# Altium PCB PCBV2.PcbDoc
Units mil, origin at the board's own origin, x right, y up, seen from the top; angles counter-clockwise.
Board outline 5453 x 2843 mil, 2 copper layers (Top Layer, Bottom Layer); 65 components, 76 nets, 228 pads, 96 vias.
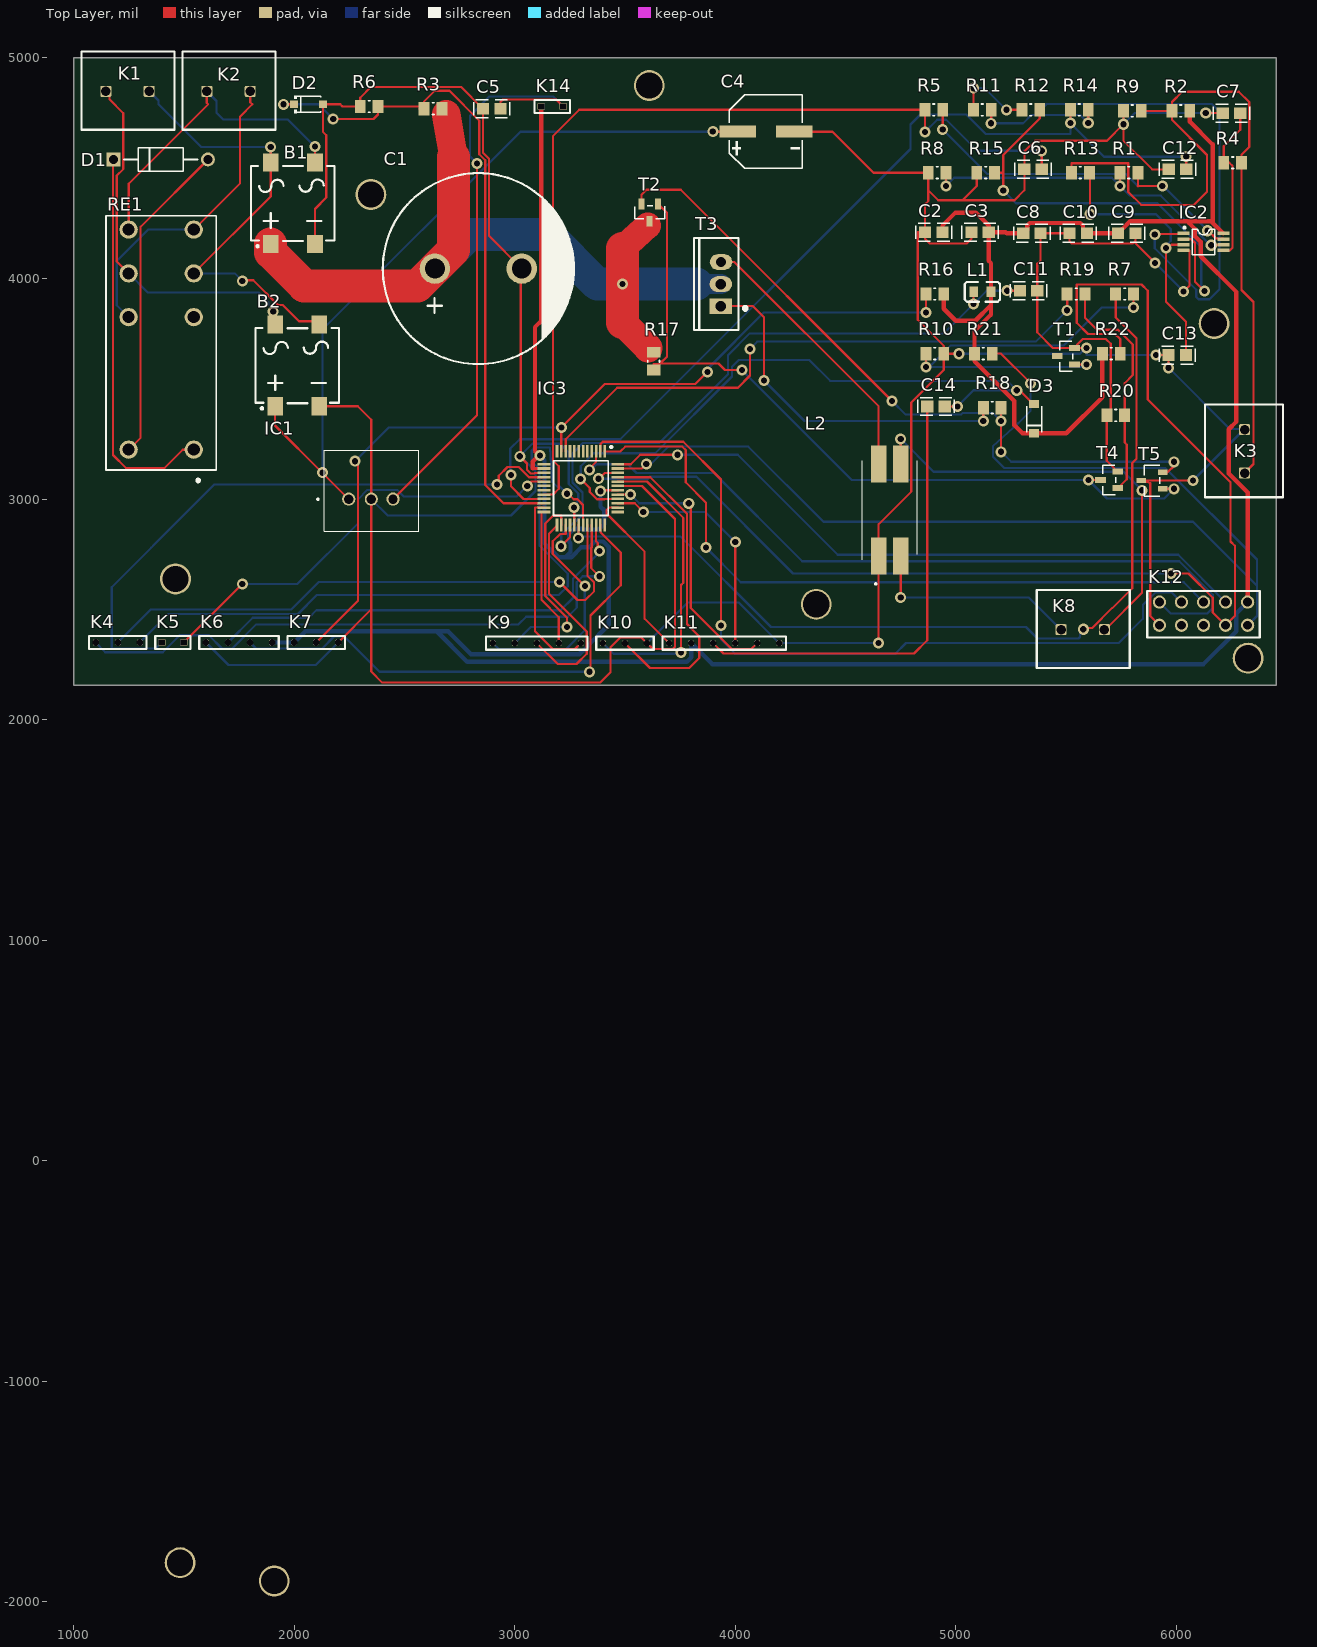
[diagram p0: Top Layer view]
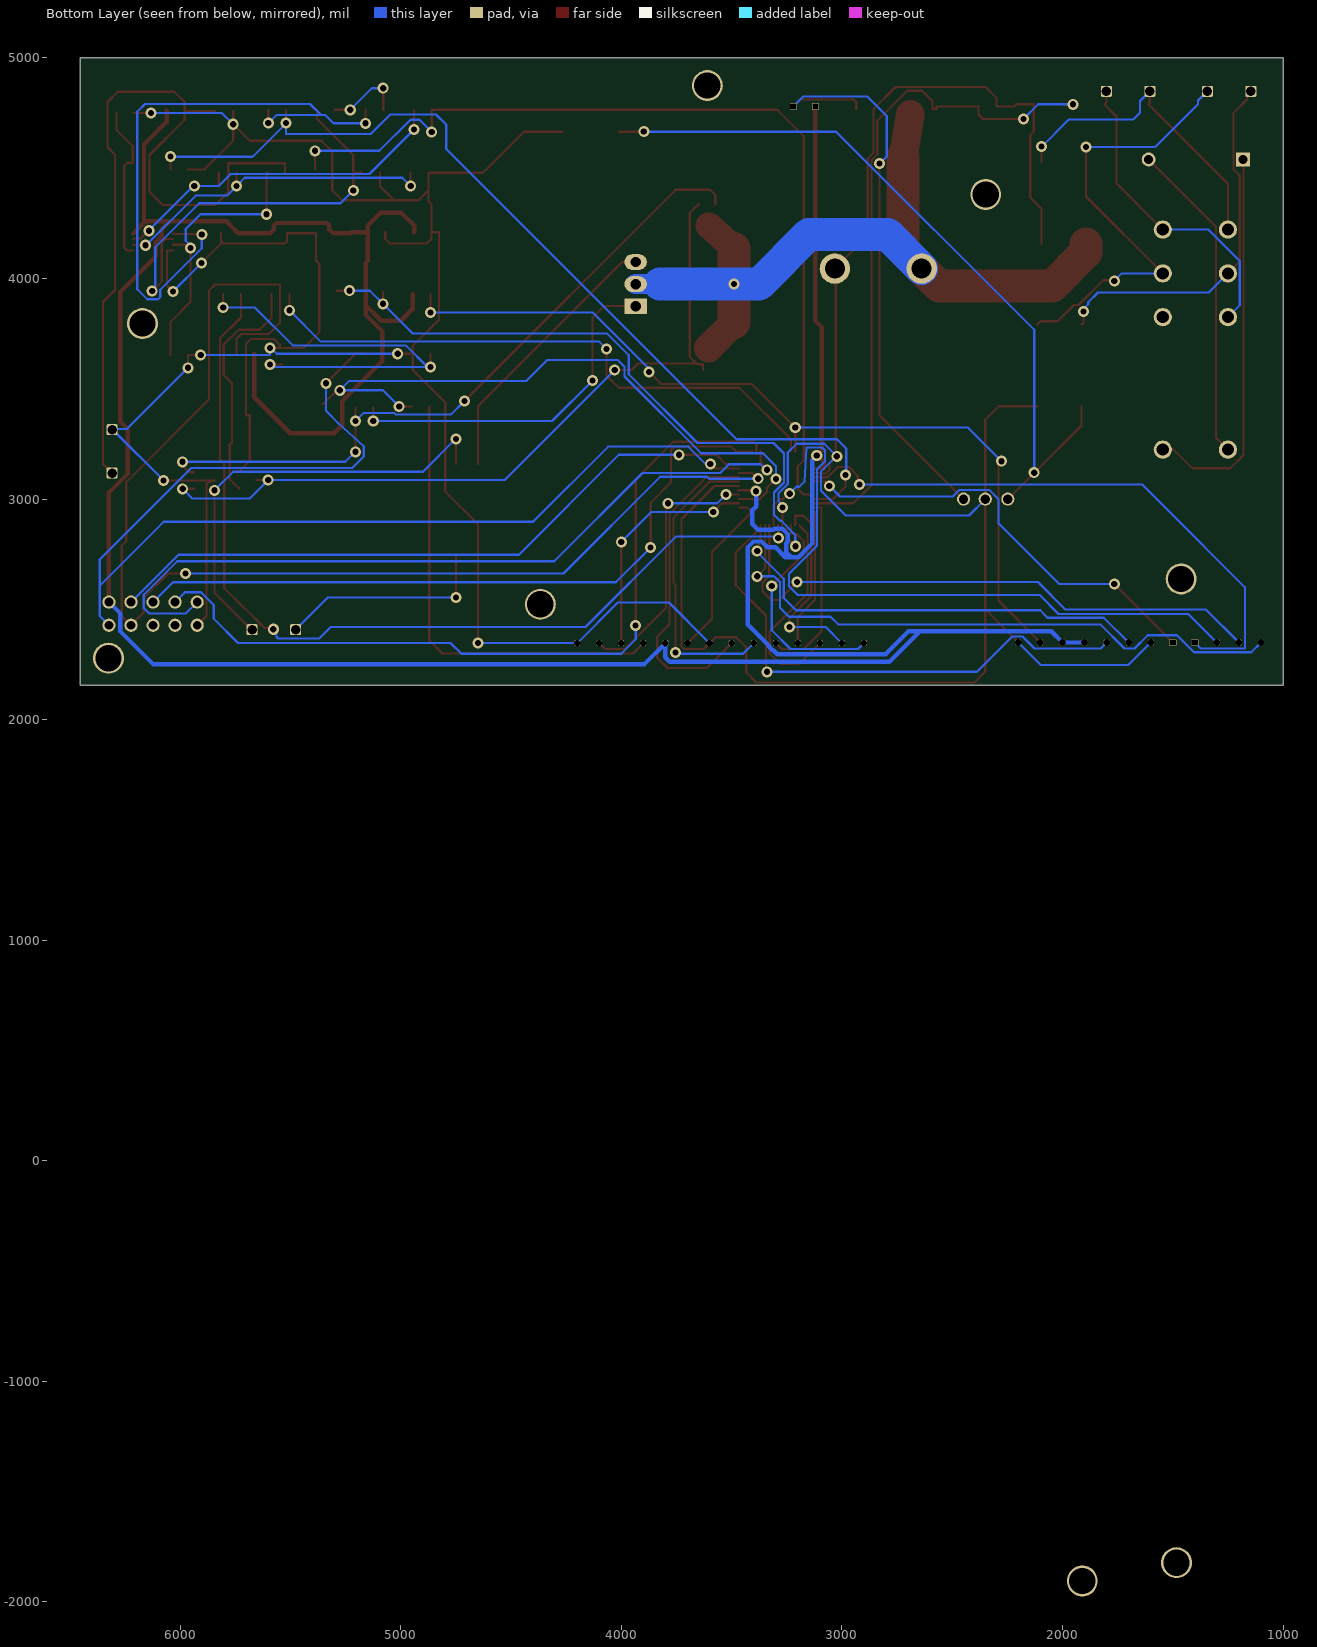
[diagram p1: Bottom Layer view, seen from below]

## Layer stack, top to bottom
Top Solder: solder mask 0.4, Solder Resist, Dk 3.5
Top Layer: signal copper 1.4
Dielectric 1: dielectric 12.6, FR-4, Dk 4.8
Bottom Layer: signal copper 1.4
Bottom Solder: solder mask 0.4, Solder Resist, Dk 3.5

## Board outline
1000,2157 6453,2157 6453,5000 1000,5000

## Design rules (kind name [scope] priority, off if disabled: settings)
Clearance [All] p1: gap=7 ignorepadtopadclearanceinfootprint=FALSE
HoleSize [All] p1: absolutevalues=TRUE maxlimit=150 minlimit=1 maxpercent=80.000 minpercent=20.000
MinimumSolderMaskSliver [All] p1: minsoldermaskwidth=6.8
PolygonConnect [All] p1: connectstyle=Relief reliefconductorwidth=10 reliefentries=4 polygonreliefangle="90 Angle" airgapwidth=10
RoutingVias [All] p1: holewidth=28 width=50 viastyle="Through Hole" minholewidth=28 minwidth=50 maxholewidth=28 maxwidth=50
SilkToSolderMaskClearance [IsPad] p1: minsilkscreentomaskgap=6.8 clearancetoexposedcopper=TRUE
SolderMaskExpansion [All] p1: expansion=4 istentingtop=FALSE
Width [All] p1: maxlimit=150 minlimit=10 preferedwidth=10
27 further rules are at their usual default settings.

## Classes and differential pairs
component class Voeding: B1 B2 C1 C4 C5 D1 D2 IC1 K1 K2 K14 R3 R6 RE1
component class Thermokoppel: C6 C7 C12 C13 IC2 K3 R1 R2 R4 R5 R8 R9 R11 R12 R13 R14 R15
component class PWMSoldeerbout: K8 L2 R17 R18 R20 T2 T3 T4 T5
component class Microcontroller: C2 C3 C8 C9 C10 C11 C14 D3 IC3 K4 K5 K7 K9 K10 K11 K12 L1 R7 R10 R16 R19 R21 R22 T1

## Components (designator, comment, footprint, x,y, rotation, side; value= is the part's Value field where it differs from the comment)
B1 "TTR8MF" "B1,2 Brug gelijkrichter" 1990,4330 r0 top
B2 "TTR8MF" "B1,2 Brug gelijkrichter" 2010,3595 r0 top
C1 "4700uF" "C1 4700uF" 2835,4045 r0 top
C2 "10uF" "C2,5,10 10uF" 4900,4210 r0 top
C3 "100nF" "C6,7,12,13 10nF" 5110,4210 r0 top
C4 "100uF" "C4 100uF" 4139,4666 r0 top
C5 "10uF" "C2,5,10 10uF" 2895.63,4770 r0 top
C6 "10nF" "C6,7,12,13 10nF" 5350,4495 r0 top
C7 "10nF" "C6,7,12,13 10nF" 6250,4750 r0 top
C8 "100nF" "C6,7,12,13 10nF" 5345,4205 r0 top
C9 "100nF" "C6,7,12,13 10nF" 5775,4205 r0 top
C10 "10uF" "C2,5,10 10uF" 5555,4205 r0 top
C11 "100nF" "C6,7,12,13 10nF" 5330,3945 r0 top
C12 "10nF" "C6,7,12,13 10nF" 6005,4495 r0 top
C13 "10nF" "C6,7,12,13 10nF" 6004,3653 r0 top
C14 "100nF" "C6,7,12,13 10nF" 4910,3420 r0 top
D1 "1N4007" FP-1N4007-MFG 1395,4540 r0 top value=15pF
D2 "" "D2 zener diode" 2065,4790 r0 top
D3 "1N4148" "D3 1N14148" 5355,3365 r90 top
IC1 "" "IC1 DC-DC converter" 2247.64,3000 r0 top
IC2 "" "IC2 opamps" 6123,4166 r270 top
IC3 "ATMEGA4809-AU" "IC3 ATMEGA4809-AU" 3300,3050 r270 top
K1 "" Terminal_2 1156,4784 r0 top
K2 "" Terminal_2 1614,4784 r0 top
K3 "" Terminal_2 6374,3128 r90 top
K4 "" PInHeader_3 1110,2285 r0 top
K5 "" PInHeader_2 1410,2285 r0 top
K6 "" PInHeader_4 1610,2285 r0 top
K7 "" PInHeader_3 2010,2285 r0 top
K8 "" Terminal_2 5487,2343 r0 top
K9 "" PInHeader_5 2910,2282 r0 top
K10 "" PInHeader_3 3410,2282 r0 top
K11 "" PInHeader_6 3710,2282 r0 top
K12 "" BOxHeader_10 5968,2518 r0 top
K14 "" PInHeader_2 3130,4715 r0 top
L1 "10uH" "L2 SmoorSpoel" 5120,3940 r0 top
L2 "" "L1 Smoorspoel" 4700,2950 r0 top
R1 "18K" RESC2013X50X30ML20T20 5785,4480 r0 top
R2 "1M" RESC2013X50X30ML20T20 6020,4760 r0 top
R3 "68K" RESC2013X50X30ML20T20 2629.65,4770 r0 top
R4 "5K6" RESC2013X50X30ML20T20 6255,4525 r0 top
R5 "5K6" RESC2013X50X30ML20T20 4900,4765 r0 top
R6 "10K" RESC2013X50X30ML20T20 2340,4780 r0 top
R7 "10K" RESC2013X50X30ML20T20 5765,3930 r0 top
R8 "100" RESC2013X50X30ML20T20 4915,4480 r0 top
R9 "10M" RESC2013X50X30ML20T20 5800,4760 r0 top
R10 "4K7" RESC2013X50X30ML20T20 4905,3660 r0 top
R11 "18K" RESC2013X50X30ML20T20 5120,4765 r0 top
R12 "18K" RESC2013X50X30ML20T20 5340,4765 r0 top
R13 "5K6" RESC2013X50X30ML20T20 5565,4480 r0 top
R14 "5K6" RESC2013X50X30ML20T20 5560,4765 r0 top
R15 "100" RESC2013X50X30ML20T20 5135,4480 r0 top
R16 "4K7" RESC2013X50X30ML20T20 4905,3930 r0 top
R17 "4K7" RESC2013X50X30ML20T20 3630,3625.35 r90 top
R18 "100" RESC2013X50X30ML20T20 5165,3415 r0 top
R19 "10K" RESC2013X50X30ML20T20 5545,3930 r0 top
R20 "4K7" RESC2013X50X30ML20T20 5725,3380 r0 top
R21 "4K7" RESC2013X50X30ML20T20 5125,3660 r0 top
R22 "4K7" RESC2013X50X30ML20T20 5705,3660 r0 top
RE1 "" "RE1 Vermogen relais" 1397.36,3224.21 r90 top
T1 "BC847C" "T1,2,4 Bipolar Transistors" 5505,3645 r0 top
T2 "BC847" "T1,2,4 Bipolar Transistors" 3615,4305 r90 top
T3 "IRF9Z34NPBF" "T3 MOSFET-P" 3935.19,3975 r90 top
T4 "BC847" "T1,2,4 Bipolar Transistors" 5701,3084 r0 top
T5 "BC857" "T5 Bipolar Transistors" 5889.63,3084 r0 top

## Footprints (in the part's own frame and the unit in brackets; to place one, negate y for a bottom-side part, rotate by r counter-clockwise, add the part's x,y. Pads: shape width x height; smd on the part's side, far side on the other; paste and mask are expansions set on the pad)
"B1,2 Brug gelijkrichter" [mm]
  rect 1.8x2.1 smd: 1(-2.449,-4.411) 2(2.651,-4.411) 3(2.651,4.989) 4(-2.449,4.989)
  silkscreen extent -4.7,-4.79 4.9,4.59
BOxHeader_10 [mil]
  round 60 hole 40: 1(-45,-90) 2(-45,15) 3(55,-90) 4(55,15) 5(155,-90) 6(155,15) 7(255,-90) 8(255,15) 9(355,-90) 10(355,15)
  silkscreen extent -100,-145 410,65
"C1 4700uF" [mm] "CAP-TH_BD22.0-P10.00-D2.3-FD"
  round 3.5 hole 2.3: 1(-5,0) 2(5,0)
  silkscreen extent -11,-11 11,11
"C2,5,10 10uF" [mm] "C0805"
  rect 1.41x1.35 smd: 1(-1,0) 2(1,0)
  silkscreen extent -2.09,-1.03 2.09,1.03
"C4 100uF" [mm]
  rect 4.2x1.4 smd: 1(-3.267,0) 2(3.267,0)
  silkscreen extent -4.2,-4.23 4.2,4.23
"C6,7,12,13 10nF" [mm] "C0805"
  rect 1.41x1.35 smd: 1(-1,0) 2(1,0)
  silkscreen extent -2.09,-1.03 2.09,1.03
"D2 zener diode" [mm] "SOD-123_L2.7-W1.7-LS3.8-RD"
  rect 0.91x0.84 smd: 1(-1.655,0) 2(1.655,0)
  silkscreen extent -1.65,-1 1.43,1
"D3 1N14148" [mm] "SOD-123_L2.8-W1.8-LS3.7-RD"
  rect 0.95x1.15 smd: 1(-1.693,0) 2(1.693,0)
  silkscreen extent -1.58,-0.87 1.41,0.87
FP-1N4007-MFG [mm]
  rect 1.6x1.6 hole 1.05 paste-1000 mask+0: 1(-5.438,0)
  round 1.6 hole 1.05 paste-1000 mask+0: 2(5.438,0)
  silkscreen extent -4.24,-1.35 4.24,1.35, body extent -6.34,-1.45 6.34,1.45, height 0.25
"IC1 DC-DC converter" [mm] "OKI78SR515W36C"
  round 1.519 hole 1.08: 1(0,0) 2(2.6,0) 3(5.1,0)
  silkscreen extent -3.6,-3.7 8.05,5.6, body extent -10,-3.38 10,3.38, height 5.8
"IC2 opamps" [mil] "MSOP-8_L3.0-W3.0-P0.65-LS4.9-BL MCP6002-E/MS"
  rect 15.98x55 smd: 1(-38.39,-90.56) 2(-12.8,-90.56) 3(12.8,-90.55) 4(38.39,-90.55) 5(38.39,90.56) 6(12.8,90.56) 7(-12.8,90.55) 8(-38.39,90.55)
  silkscreen extent -70,-91 59,51
"IC3 ATMEGA4809-AU" [mm] "QFP50P900X900X120-48N"
  rect 1.475x0.3 smd: 1(-4.238,2.75) 2(-4.238,2.25) 3(-4.238,1.75) 4(-4.238,1.25) 5(-4.238,0.75) 6(-4.238,0.25) 7(-4.238,-0.25) 8(-4.238,-0.75) 9(-4.238,-1.25) 10(-4.238,-1.75) 11(-4.238,-2.25) 12(-4.238,-2.75) 25(4.238,-2.75) 26(4.238,-2.25) 27(4.238,-1.75) 28(4.238,-1.25) 29(4.238,-0.75) 30(4.238,-0.25) 31(4.238,0.25) 32(4.238,0.75) 33(4.238,1.25) 34(4.238,1.75) 35(4.238,2.25) 36(4.238,2.75)
  rect 0.3x1.475 smd: 13(-2.75,-4.238) 14(-2.25,-4.238) 15(-1.75,-4.238) 16(-1.25,-4.238) 17(-0.75,-4.238) 18(-0.25,-4.238) 19(0.25,-4.238) 20(0.75,-4.238) 21(1.25,-4.238) 22(1.75,-4.238) 23(2.25,-4.238) 24(2.75,-4.238) 37(2.75,4.238) 38(2.25,4.238) 39(1.75,4.238) 40(1.25,4.238) 41(0.75,4.238) 42(0.25,4.238) 43(-0.25,4.238) 44(-0.75,4.238) 45(-1.25,4.238) 46(-1.75,4.238) 47(-2.25,4.238) 48(-2.75,4.238)
  silkscreen extent -4.85,-3.15 3.15,3.63, body extent -10,-3.38 10,3.38, height 5.8
"L1 Smoorspoel" [mm]
  rect 1.78x4.27 smd: 1(-1.27,-5.305) 2(1.27,-5.305) 3(1.27,5.305) 4(-1.27,5.305)
  silkscreen extent -3.15,-8.6 3.15,5.69, body extent -10,-3.38 10,3.38, height 5.8
"L2 SmoorSpoel" [mm]
  rect 1x1.25 smd: 1(-1,0) 2(1,0)
  silkscreen extent -2.03,-1.14 2.03,1.14
PInHeader_2 [mil]
  rrect25% 32x32 hole 26 square: 1(-10,65) 2(90,65)
  silkscreen extent -40,35 120,95
PInHeader_3 [mil]
  rrect50% 26x26 hole 30: 1(-10,65) 2(90,65) 3(190,65)
  silkscreen extent -40,35 220,95
PInHeader_4 [mil]
  rrect50% 26x26 hole 30: 1(-10,65) 2(90,65) 3(190,65) 4(290,65)
  silkscreen extent -40,35 320,95
PInHeader_5 [mil]
  rrect50% 26x26 hole 30: 1(-10,65) 2(90,65) 3(190,65) 4(290,65) 5(390,65)
  silkscreen extent -40,35 420,95
PInHeader_6 [mil]
  rrect50% 26x26 hole 30: 1(-10,65) 2(90,65) 3(190,65) 4(290,65) 5(390,65) 6(490,65)
  silkscreen extent -40,35 520,95
"RE1 Vermogen relais" [mm] "RT42"
  round 2.1 hole 1.4: 1(0,-3.75) 2(15.26,-3.75) 3(20.3,-3.75) 4(25.34,-3.75) 5(25.34,3.75) 6(20.3,3.75) 7(15.26,3.75) 8(0,3.75)
  silkscreen extent -3.67,-6.35 26.92,6.35, body extent -10,-3.38 10,3.38, height 5.8
RESC2013X50X30ML20T20 [mm] "Chip Resistor, 2-Leads, Body 2.00x1.25mm, IPC Low Density"
  rect 1.25x1.55 smd: 1(-1.025,0) 2(1.025,0)
  silkscreen extent -0.1,-0.67 0.1,0.67, body extent -1.1,-0.72 1.1,0.72, height 0.5
"T1,2,4 Bipolar Transistors" [mm] "BC847C"
  rect 1.25x0.7 smd: 1(0.847,-0.872) 2(0.847,1.028) 3(-1.153,0.078)
  silkscreen extent -0.89,-1.65 0.64,1.78
"T3 MOSFET-P" [mm] "TO-220-3_L10.0-W4.5-P2.54-L"
  rect 1.8x2.6 hole 1.2: 1(-2.54,0.005)
  oval 1.8x2.6 hole 1.2: 2(0,0.005) 3(2.54,-0.005)
  silkscreen extent -5.3,-2.99 5.3,3.09
"T5 Bipolar Transistors" [mm] "SOT-23-3_L2.9-W1.6-P1.90-LS2.8-BR"
  rect 1.07x0.6 smd: 1(1.235,-0.95) 2(1.235,0.95) 3(-1.235,0)
  silkscreen extent -0.88,-1.78 0.89,1.78
Terminal_2 [mil]
  rrect25% 50x50 hole 43.31: 1(-10,65) 2(186.85,65)
  silkscreen extent -120,-109 301,245

## Part data
B1 B2: library part "B1,2 Brug Gelijkrichter", BOM_JLCPCB Part Class="Extended Part", BOM_Manufacturer=MDD, BOM_Manufacturer Part=TTR8MF, BOM_Supplier=LCSC, BOM_Supplier Part=C712546, Contributor=LCSC, spicePre=D, spiceSymbolName=TTR8MF
C1: library part "C1 4700uF", BOM_JLCPCB Part Class="Extended Part", BOM_Manufacturer=CX(承兴), BOM_Manufacturer Part=KM478M050N35RR0VH2FP0, BOM_Supplier=LCSC, BOM_Supplier Part=C45662, nameAlias=Capacitance, spicePre=C, spiceSymbolName="4700uF 50V 22*35"
C2 C5 C10: library part "C2,5,10 10uF", BOM_JLCPCB Part Class="Basic Part", BOM_Manufacturer=muRata(村田), BOM_Manufacturer Part=GRM21BR61H106KE43L, BOM_Supplier=LCSC, BOM_Supplier Part=C440198, Contributor=LCSC, nameAlias=Capacitance, spicePre=C, spiceSymbolName=GRM21BR61H106KE43L
C3 C14: library part "C 100nF"
C4: library part "C4 100uF", BOM_JLCPCB Part Class="Extended Part", BOM_Manufacturer=Nichicon(尼吉康), BOM_Manufacturer Part=UWT1H101MNL1GS, BOM_Supplier=LCSC, BOM_Supplier Part=C445063, Contributor=LCSC, nameAlias=Capacitance, spicePre=C, spiceSymbolName=UWT1H101MNL1GS
C6 C7 C8 C9 C11 C12 C13: library part "C6,7,12,13 10nF", BOM_JLCPCB Part Class="Extended Part", BOM_Manufacturer=CCTC(三环), BOM_Manufacturer Part=TCC0805X7R103M500DT, BOM_Supplier=LCSC, BOM_Supplier Part=C376921, Contributor=LCSC, nameAlias=Capacitance, spicePre=C, spiceSymbolName=TCC0805X7R103M500DT
D1: library part zo_1N4007, "DIODE GEN PURP 1KV 1A DO204AL", Capacitance=15pF, Forward Current=1A, Manufacturer=Vishay, Manufacturer Part Number=1N4007-E3/54, Max Junction Temp=+150°C, Max Repetitive Reverse Voltage=1000V, Max Surge Forward Current=30A, Peak Reverse Current=30uA, Temperature="-50°C to +150°C", Temperature Range Low=-50°C, Automotive=No, Category=Diode, ComponentLink2Description=Datasheet, ComponentLink2URL=http://www.vishay.com/docs/88503/1n4001.pdf, Device Class L1="Discrete Semiconductors", Device Class L2=Diodes, Device Class L3="Rectifier Diodes", Digikey Description="DIODE GEN PURP 1KV 1A DO204AL", Height=2.7mm, Ipc Land Pattern Name=DIOPA1088W105L520D270, Lead Free=Yes, Mouser Description="Rectifiers Vr/1000V Io/1A", Octopart=https://octopart.com/1n4007-e3%2F54-vishay-39548207, Package=1N4007, RoHS=TRUE, Temperature Range High=+150°C
D2: library part "D2 zener diode", "BZT52C5V1_C1884555", BOM_JLCPCB Part Class="Extended Part", BOM_Manufacturer=YFW(佑风微), BOM_Manufacturer Part=BZT52C5V1, BOM_Supplier=LCSC, BOM_Supplier Part=C1884555, Contributor=LCSC, spicePre=D, spiceSymbolName=BZT52C5V1_C1884555
D3: library part "D3 1N14148", "1N4148W-C84367", BOM_JLCPCB Part Class="Extended Part", BOM_Manufacturer=MDD, BOM_Manufacturer Part=1N4148W, BOM_Supplier=LCSC, BOM_Supplier Part=C84367, spicePre=D, spiceSymbolName=1N4148W-C84367
IC1: library part "IC1 OKI-78SR-5_1.5-W36-C", "Non-Isolated DC/DC Converters 7.5W 24Vin 5Vout1 1.5A SIP Non-Iso", Manufacturer_Name="Murata Electronics", Manufacturer_Part_Number=OKI-78SR-5/1.5-W36-C, Mouser Part Number=580-OKI78SR5/1.5W36C, Datasheet Link=https://www.murata.com/products/productdata/8807037992990/oki-78sr.pdf?1583754815000, Geometry.Height=16.5mm, Mouser Price/Stock=https://www.mouser.co.uk/ProductDetail/Murata-Power-Solutions/OKI-78SR-5-1.5-W36-C?qs=uJpRT2lXVNXJP%252Bo08dQqJQ%3D%3D
IC2: library part "IC2 dual opamps", "IC2 dual opamps"
IC3: library part "IC3 ATMEGA4809-AU", "8-bit Microcontrollers - MCU 20MHz, 48KB, TQFP", Manufacturer_Name=Microchip, Mouser Part Number=556-ATMEGA4809-AU, Geometry.Height=1.2mm, Manufacturer_Part_Number=ATMEGA4809-AU, Mouser Price/Stock=https://www.mouser.co.uk/ProductDetail/Microchip-Technology-Atmel/ATMEGA4809-AU?qs=P1JMDcb91o4zLIorxO9tIg%3D%3D
K1 K2 K3 K8: library part "K Terminal_2"
K4 K7 K10: library part "K PinHeader_3"
K5 K14: library part "K PinHeader_2"
K6: library part "K PinHeader_4"
K9: library part "K PinHeader_5"
K11: library part "K PinHeader_6"
K12: library part "K Boxheader_10"
L1: library part "L2 smoorspoel", BOM_JLCPCB Part Class="Extended Part", BOM_Manufacturer=KOHERelec(科或), BOM_Manufacturer Part=PMI201214S-100M, BOM_Supplier=LCSC, BOM_Supplier Part=C2922559, Contributor=LCSC, nameAlias=Inductance, spicePre=L, spiceSymbolName=PMI201214S-100M
L2: library part "L2 Common Mode Choke", "Common Mode Chokes / Filters 170ohms 100MHz 10A 1 Choke SMD", Manufacturer_Name="Laird Performance Materials", Manufacturer_Part_Number=CM2545X171R-10, Mouser Part Number=875-CM2545X171R-10, Datasheet Link=https://componentsearchengine.com/Datasheets/1/CM2545X171R-10.pdf, Geometry.Height=9.5mm, Mouser Price/Stock=https://www.mouser.co.uk/ProductDetail/Laird-Performance-Materials/CM2545X171R-10?qs=gHrF1kHvtHWa9UjYzLX7bQ%3D%3D
R1 R2 R3 R4 R5 R6 R7 R8 R9 R10 R11 R12 R13 R14 R15 R16 R17 R18 R19 R20 R21 R22: library part "R Resistor", Manufacturer="Vishay Dale", Part Number=CRCW08050000Z0EA
RE1: library part "RE1 Vermogen relais", "RT424005F  General Purpose Relays DPDT 8A 5VDC GEN PURPOSE RELAY", Manufacturer_Name="TE Connectivity", Manufacturer_Part_Number=RT424005F, Mouser Part Number=655-RT424005F, Datasheet Link=https://datasheet.datasheetarchive.com/originals/distributors/Datasheets_SAMA/2ef22a7a34dcc6453ddb52063c55ccaa.pdf, Mouser Price/Stock=https://www.mouser.co.uk/ProductDetail/TE-Connectivity-PB/RT424005F?qs=8wHch9UpSvaH%252B%252BmsSCbj0Q%3D%3D
T1: library part "T1,2,4 transisitors", "BC847C_C3027113", BOM_JLCPCB Part Class="Extended Part", BOM_Manufacturer=SALLTECH(萨瑞), BOM_Manufacturer Part=BC847C, BOM_Supplier=LCSC, BOM_Supplier Part=C3027113, Contributor=lcsc, link=https://atta.szlcsc.com/upload/public/pdf/source/20220824/287706FC7904CA05889B348536529CCD.pdf, spicePre=Q, spiceSymbolName=BC847C_C3027113
T2 T4: library part "T1,2,4 transisitors", "BC847C_C3027113", BOM_JLCPCB Part Class="Extended Part", BOM_Manufacturer=SALLTECH(萨瑞), BOM_Manufacturer Part=BC847C, BOM_Supplier=LCSC, BOM_Supplier Part=C3027113, Contributor=lcsc, link=https://atta.szlcsc.com/upload/public/pdf/source/20220824/287706FC7904CA05889B348536529CCD.pdf, spicePre=Q, spiceSymbolName=BC847C_C3027113
T3: library part "T3 MOSFET-P", BOM_JLCPCB Part Class="Extended Part", BOM_Manufacturer=Infineon(英飞凌), BOM_Manufacturer Part=IRF9Z34NPBF, BOM_Supplier=LCSC, BOM_Supplier Part=C500523, Contributor=LCSC, spicePre=Q, spiceSymbolName=IRF9Z34NPBF
T5: library part "T5 Bipolar Transistor", "BC857 3G", BOM_JLCPCB Part Class="Extended Part", BOM_Manufacturer=CJ(江苏长电/长晶), BOM_Manufacturer Part=BC857, BOM_Supplier=LCSC, BOM_Supplier Part=C2139, spicePre=Q, spiceSymbolName="BC857 3G"

## Free pads (board coordinates)
  round 140 hole 119: 4(1462,2638) 4(1483,-1822) 4(1910,-1905) 4(2348,4381) 4(3610,4875) 4(4367,2523) 4(6171,3796) 4(6325,2279)

## Via types
v1: diameter 50, hole 28, Top Layer to Bottom Layer, 96 vias

## Nets (pads, with @x,y where several pads share a name; then routed paths per layer and width w, separated by ;. In a path a pad name is that pad's centre, name@x,y a point inside that pad or via, vN(x,y) a via of type N, cw(c..) or ccw(c..) an arc to the next point about the centre after c; other vN are vias at no path point)
+5: C2.2 C3.2 C8.1 C9.1 C10.2 D3.1 IC2.8 IC3.14 IC3.42 K6.4 K7.1 K11.2 K12.10 K14.1 L1.2 R2.2 R16.2 R21.1 R22.1 | length 14936
  Top Layer w10: v1@3109,3197 v1(3114,3197) ; IC2.8@6213,4204.39 IC2.8
  Top Layer w11: v1(3389,3036) 3392.75,3039.75 3466.44,3039.75 IC3.42@3466.85,3040.16
  Top Layer w12: 3081,3138.58 IC3.14@3133.15,3138.58
  Top Layer w20: 3081,3138.58 3081,3169 3109,3197 3092,3219 3092,3780 3120,3808 K14.1 ; C2.2 4939.37,4240 4998.37,4299 5090.37,4299 5149.37,4240 C3.2 ; R16.2 4945.35,3863.65 5000,3809 5088.37,3809 5159.37,3880 ; R22.1 5664.65,3462.01 5501,3298.37 D3.1 5302.36,3298.37 5265,3335.73 5265,3445 5084.65,3625.35 R21.1 5084.65,3762 5159.37,3836.72 5159.37,3880 ; 6056.79,4252.21 6084,4225 6084,4192.11 6110,4166.11 6110,4101 6272,3939 6272,3351.38 6237,3316.38 6237,3116 6323,3030 K12.10 ; R2.2 6060.35,4711.65 6164,4608 6164,4253.39 ; IC2.8@6213,4204.39 6164,4253.39 ; C3.2 5225,4210 5230,4205 5306.81,4205 5323.39,4221.57 5323.39,4240.28 5335.1,4252 5564.9,4252 5576.62,4240.28 5576.62,4221.57 5593.19,4205 C9.1 5736.81,4205 5753.39,4221.57 5753.39,4222.76 5790.07,4259.44 6056.79,4259.44 6157.95,4259.44 6164,4253.39 ; C3.2 5149.37,4080 5159.37,4070 L1.2 5159.37,3880
  Bottom Layer w10: v1(3114,3197) 3134,3177 ; 3800,2317.13 3801,2316.13
  Bottom Layer w20: K6.4 K7.1 2051,2401 2646,2401 ; 3134,3177 3135,3176 3135,2799 3197,2737 3230,2737 ; v1(3389,3036) 3389,2965.94 3406,2948.94 3406,2887 3380,2861 3311.01,2861 3305.62,2866.39 3270.83,2866.39 3246.22,2841.78 3246.22,2806.99 3253,2800.21 3253,2760 3230,2737 ; 3800,2317.13 K11.2 3895,2252 6123,2252 6271,2400 6271,2481 K12.10 ; 3801,2316.13 3801,2282.93 3780,2261.93 2785.07,2261.93 2646,2401 ; 2646,2401 2698,2401 2802,2297 3293,2297 3311,2315 3314.23,2315 3332,2332.77 3332,2336 3426,2430 3426,2783 3401,2808 3364.5,2808 3338.89,2782.39 3302.39,2782.39 3257,2737 3230,2737
GND: B1.2 B2.2 C1.2 C2.1 C3.1 C4.2 C5.1 C6.1 C7.1 C8.2 C9.2 C10.1 C11.2 C12.1 C13.1 D2.2 IC1.2 IC2.4 IC3.15 IC3.29 IC3.43 K3.2 K6.1 K7.3 K10.3 K11.6 K12.1 L2.1 R6.1 R8.1 R9.1 R10.2 R15.1 R20.1 T1.2 T4.2 T5.3 | length 21809.3
  Top Layer w10: B1.2 2094.37,4315.37 2146,4367 2146,4650.16 2130.16,4666 D2.2 2209,4790 2219,4780 R6.1 2299.65,4820.29 2347.35,4868 2757.08,4868 2855.08,4770 C5.1 2856.26,4570.11 2883,4543.37 2883,4193.85 C1.2 3027.43,4040.57 3027.43,3198.43 v1(3023,3194) 3055.61,3161.39 3055.61,3132.86 3071.89,3116.58 3090.11,3116.58 3092.43,3118.9 IC3.15@3133.15,3118.9 ; B2.2 2288.66,3421.34 2350,3360 IC1.2 2350,2500 ; K7.3 2350,2500 ; v1(3269,2962) 3269.74,2961.26 3269.74,2883.89 IC3.29@3270.47,2883.15 ; IC3.43@3466.85,3059.84 3577.16,3059.84 3727,2910 3727,2330 3717,2320 3627,2320 K10.3 3573,2374 3480,2374 3434,2328 3434,2215 3387,2168 2400,2168 2350,2218 2350,2500 ; C4.2 4441,4666 4627,4480 R8.1 4874.65,4400 ; v1(4650,2347) L2.1 4650,2886 4798,3034 4798,3438 4945.35,3585.35 R10.2 ; v1(5014,3659) 4946.35,3659 R10.2 ; C3.1 5070.63,4180 5049.26,4158.63 4882,4158.63 4860.63,4180 C2.1 ; R15.1 5094.65,4419.49 5030.16,4355 ; v1(5592.95,3685.49) T1.2@5549,3685.49 ; T4.2 5684.65,3174.19 R20.1 5702,3380 5702,3704 5680,3726 5575,3726 5549,3700 T1.2@5549,3685.49 ; R9.1 v1(5759.65,4699.49) ; C9.2 5814.37,4170 ; v1(5902.74,4071) 5814.37,4159.37 5814.37,4170 ; v1(5907,3653) C13.1 v1(5964.63,3595.37) ; K12.1 5881,2470 5881,3073 T5.3 v1(6075,3084) ; C12.1 5890,4495 5759.65,4625.35 v1(5759.65,4699.49) ; IC2.4 6060,4127.61 6060,3968.26 v1(6032.74,3941) ; v1(6133,4750) C7.1 ; C2.1 4860.63,4337 4874.65,4351.02 4874.65,4400 ; C2.1 4827,4210 4827,3813 4945.35,3694.65 R10.2 ; 4874.65,4400 4919.65,4355 5030.16,4355 ; 5030.16,4355 5265.63,4355 5310.63,4400 C6.1 5310.63,4575.63 5360,4625 5685.16,4625 v1(5759.65,4699.49) ; T1.2@5549,3685.49 T1.2 5440,3685.49 5369.37,3756.12 C11.2 5369.37,4067 5384.37,4082 C8.2 C10.1 5515.63,4168.37 5524.63,4159.37 5803.74,4159.37 5814.37,4170
  Bottom Layer w10: K6.1 1702,2248 2098,2248 K7.3 ; IC1.2 2424,2926 2983,2926 3094.12,3037.12 3094.12,3125.73 3025.85,3194 v1(3023,3194) 3080,3251 3205,3251 3245,3211 3245,3068.63 3288,3025.63 3288,2991.82 3269,2972.82 v1(3269,2962) ; K10.3 3784,2531 4016,2531 K11.6 v1(4650,2347) ; v1(5014,3659) 5562.87,3659 5589.36,3685.49 v1(5592.95,3685.49) 5592.95,3653 v1(5907,3653) ; v1(5759.65,4699.49) 5810.16,4750 v1(6133,4750) ; v1(5902.74,4071) v1(6032.74,3941) ; v1(5964.63,3595.37) 6242,3318 6309,3318 v1(6075,3084)
NetB1_3: B1.3 K2.1 RE1.5 | length 1475.8
  Top Layer w10: RE1.5@1249.72,4221.85 1249.72,4429.72 1610,4790 1604,4796 K2.1 ; B1.3 v1(2094.37,4598)
  Bottom Layer w10: K2.1 1648,4805 1648,4752 1679,4721 1971.37,4721 v1(2094.37,4598)
NetB1_4: B1.4 B2.3 K1.2 RE1.3 | length 2051.2
  Top Layer w10: RE1.3 1893.58,4372.01 v1(1893.58,4597) ; v1(1765,3989) 1768.35,3992.35 1814.65,3992.35 1927,3880 1948,3880 2022,3806 2099.79,3806 B2.3
  Bottom Layer w10: K1.2 1385,4806.85 1385,4790 1578,4597 v1(1893.58,4597) ; RE1.3 1730.57,4023.43 v1(1765,3989)
NetB2_1: B2.1 C4.1 IC1.1 | length 3462.2
  Top Layer w10: B2.1 1913.58,3334.06 v1(2128,3119.64) IC1.1 ; v1(3898,4666) C4.1
  Bottom Layer w10: v1(2128,3119.64) 2128,3767.67 3026.33,4666 v1(3898,4666)
NetB2_4: B2.4 K1.1 RE1.6 | length 1693.9
  Top Layer w10: K1.1 1163.5,4831.5 1163.5,4811.5 1225,4750 1225,4496 1196,4467 1196,4077.15 RE1.6 ; v1(1904.89,3850.34) 1904.89,3800.11 B2.4
  Bottom Layer w10: RE1.6 1336.15,3937 1838.58,3937 1883.25,3892.34 1883.25,3882.8 1904.89,3861.16 v1(1904.89,3850.34)
NetC5_2: C5.2 IC1.3 K14.2 | length 2720
  Top Layer w10: IC1.3 2829,3380.57 v1(2829,4521) ; C5.2 2935,4800 2947,4812 3188,4812 K14.2
  Bottom Layer w10: v1(2829,4521) 2797,4553 2797,4737 2886,4826 3174,4826 K14.2
NetC6_2: C6.2 IC3.20 R5.1 | length 4219.1
  Top Layer w10: IC3.20@3133.15,3020.47 3173.7,3020.47 3200,3046.77 3200,3149 3173,3176 3173,4645 3293,4765 R5.1 v1(4859.65,4664.49) ; C6.2 v1(5389.37,4579)
  Bottom Layer w10: v1(4859.65,4664.49) 4915.16,4720 4956,4720 5097,4579 v1(5389.37,4579)
NetC7_2: C7.2 IC2.5 R4.1 | length 717.7
  Top Layer w10: IC2.5 6241.61,4127.61 6254,4140 6254,4511 6240,4525 R4.1 6214.65,4600 6289.37,4674.73 C7.2
NetC11_1: C11.1 IC3.28 L1.1 | length 3036.5
  Top Layer w10: v1(3209.7,2786.26) 3210.26,2786.26 3250.79,2826.79 IC3.28@3250.79,2883.15 ; v1(5080.63,3885.39) L1.1 ; v1(5233,3945) C11.1
  Bottom Layer w10: v1(3209.7,2786.26) 3211,2787.56 3211,2837.67 3275.16,2901.84 3280.17,2901.84 3307.47,2929.15 3307.47,3030.2 3262,3075.67 3262,3206.5 3310,3254.5 3654.95,3254.5 3966.72,3566.27 3966.72,3652.72 4065.42,3751.42 4946.66,3751.42 v1(5080.63,3885.39) 5140.24,3945 v1(5233,3945)
NetC12_2: C12.2 IC3.21 R14.1 | length 4370.5
  Top Layer w10: v1(2983,3109) 2983,3057.79 3040,3000.79 IC3.21@3133.15,3000.79 ; v1(5519.65,4704.49) R14.1 ; C12.2 v1(6044.37,4552.63)
  Bottom Layer w10: v1(2983,3109) 2980,3112 2980,3229.15 3022.35,3271.5 3478.25,3271.5 4794,4587.25 4794,4698 4840,4744 5047,4744 5136,4655 5519.65,4655 v1(5519.65,4704.49) 5671.51,4552.63 v1(6044.37,4552.63)
NetC13_2: C13.2 IC2.3 R13.2 | length 1286.8
  Top Layer w10: R13.2 5608.81,4476.54 v1(5608.81,4291.44) ; IC2.3 5978.02,4153.2 5963.82,4139 v1(5953,4139) 5953,3895 6043.37,3804.63 C13.2
  Bottom Layer w10: v1(5608.81,4291.44) 5907.56,4291.44 5974.8,4224.2 5974.8,4171.62 5953,4149.82 v1(5953,4139)
NetC14_1: C14.1 K11.3 | length 2075
  Top Layer w10: K11.3 3947,2300 4810.63,2300 4870.63,2360 C14.1
NetC14_2: C14.2 D3.2 IC3.40 | length 2994.5
  Top Layer w10: v1(3299,3091) 3340.05,3049.95 3340.05,3032.39 3373.44,2999 3407.35,2999 3409.14,3000.79 IC3.40@3466.85,3000.79 ; C14.2 v1(5007,3420) ; v1(5276.2,3493.2) 5283.85,3485.54 5297.15,3485.54 5351.06,3431.63 D3.2
  Bottom Layer w10: v1(3299,3091) 3299,3149 3357.5,3207.5 3637.17,3207.5 3985.33,3555.66 3985.33,3600 4015.65,3630.33 4335.67,3630.33 4430,3536 5233.4,3536 v1(5276.2,3493.2) ; v1(5007,3420) 5080.2,3493.2 5271.8,3493.2 v1@5274,3491
NetC17_1: 
NetC18_1: 
NetC19_1: 
NetD1_1: D1.1 RE1.1 | length 1766.5
  Top Layer w10: D1.1 1179,4538.09 1179,3200 1239,3140 1411,3140 1495.21,3224.21 RE1.1
NetD1_2: D1.2 RE1.8 | length 1464.6
  Top Layer w10: RE1.8 1304,3278.49 1304,4234.91 D1.2
NetD2_1: D2.1 IC3.22 R3.1 R6.2 | length 3091.3
  Top Layer w10: v1(1952,4790) D2.1 ; v1(2177,4723) 2360,4723 2380.35,4743.35 R6.2 2569.68,4780 2569.68,4770 R3.1 2589.29,4803.29 2637,4851 2703.96,4851 2839.26,4715.7 2839.26,4563.07 2866,4536.33 2866,3063.98 2948.88,2981.1 IC3.22@3133.15,2981.1
  Bottom Layer w10: v1(1952,4790) 2110,4790 v1(2177,4723)
NetIC2_1: IC2.1 R11.2 R14.2 | length 2888
  Top Layer w10: v1(5160,4704) 5160.35,4704.35 R11.2 ; v1(5600.35,4704.49) R14.2 ; v1(5902,4200) 5904.19,4202.19 6030.25,4202.19 IC2.1
  Bottom Layer w10: v1(5160,4704) 5305,4704 5343,4742 5362,4742 ; v1(5600.35,4704.49) 5562.84,4742 5362,4742 ; v1(5902,4200) 5902,4137.67 6090,3949.67 6090,3916 6100,3906 6150,3906 6195,3951 6195,4756 6160,4791 5411,4791 5362,4742
NetIC2_2: IC2.2 R12.2 R15.2 | length 1978.1
  Top Layer w10: R15.2 5215,4480 ; v1(5215,4399) 5215,4480 ; R12.2 5380.35,4725.35 5215,4560 5215,4480 ; IC2.2 6066.2,4178.8 6084,4161 6084,3986 v1(6127,3943)
  Bottom Layer w10: v1(5215,4399) 5273,4341 5914,4341 6113,4142 6113,3967.82 6127,3953.82 v1(6127,3943)
NetIC2_6: IC2.6 R1.1 R8.2 | length 1524.3
  Top Layer w10: v1(4955,4419) 4955.35,4419.35 R8.2 ; R1.1 5744.65,4419.35 v1(5745,4419) ; v1(6158,4150.99) 6159.1,4152.1 6212.45,4152.1 IC2.6
  Bottom Layer w10: v1(4955,4419) 4993,4457 5707,4457 v1(5745,4419) 5788,4376 5929.67,4376 6154.67,4150.99 v1(6158,4150.99)
NetIC2_7: IC2.7 R1.2 R5.2 | length 1743
  Top Layer w10: v1(4940.35,4675.65) R5.2 ; R1.2 5825.35,4419 ; v1(5936,4419) 5825.35,4419 ; v1(6141.36,4216.63) 6144.69,4216.63 6179.53,4181.79 6210.56,4181.79 IC2.7 ; 5825.35,4419 5825.35,4418.65 5825,4419 5825.35,4419
  Bottom Layer w10: v1(4940.35,4675.65) 5142,4474 5770.84,4474 5825.1,4419.74 5825.35,4420 5940.7,4420 6141.36,4219.34 v1(6141.36,4216.63)
NetIC3_1: IC3.1 K12.6 | length 3221.7
  Top Layer w10: IC3.1@3408.27,3216.85 3408.27,3216 3479,3216 3501,3238 3760,3238 3775,3223 3775,3076 3867,2984 v1(3867,2781)
  Bottom Layer w10: v1(3867,2781) 4025,2623 6033,2623 K12.6
NetIC3_2: IC3.2 K12.4 | length 3665
  Top Layer w10: IC3.2@3388.58,3216.85 3388.58,3250 3398.58,3260 3764,3260 3935,3089 v1(3935,2427)
  Bottom Layer w10: v1(3935,2427) 3935,2364 4000,2299 4725,2299 4774,2348 5738,2348 5848,2458 5848,2520 5906,2578 5978,2578 K12.4
NetIC3_3: IC3.3 K12.2 | length 3511.7
  Top Layer w10: v1(3339,3133) 3339,3138.65 3367.99,3167.65 3367.99,3215.94 IC3.3@3368.9,3216.85
  Bottom Layer w10: v1(3339,3133) 3345.57,3133 3370.57,3158 3512,3158 3552,3118 3904,3118 4304,2718 6013,2718 6165,2566 6165,2506 6140,2481 5975,2481 K12.2
NetIC3_10: IC3.10 R19.1 | length 2714.9
  Top Layer w10: IC3.10@3231.1,3216.85 3231.1,3271 3465.1,3505 4012,3505 4067,3560 v1(4067,3681) ; v1(5504.65,3856) R19.1
  Bottom Layer w10: v1(4067,3681) 4100,3714 5362.65,3714 v1(5504.65,3856)
NetIC3_11: IC3.11 K7.2 R16.1 | length 3973.7
  Top Layer w10: K7.2 2290,2540 2290,3158 v1(2276,3172) ; IC3.11@3211.42,3216.85 v1(3211.42,3325) 3408.42,3522 3819,3522 v1(3874,3577) ; v1(4864.65,3846.65) R16.1
  Bottom Layer w10: v1(2276,3172) 2429,3325 v1(3211.42,3325) ; v1(3874,3577) 3874,3590 4130.65,3846.65 v1(4864.65,3846.65)
NetIC3_16: IC3.16 K5.1 | length 2740.4
  Top Layer w10: v1(2920,3066) 2927.65,3073.65 2927.65,3105.98 2967.67,3146 3018.43,3146 3065.22,3099.21 IC3.16@3133.15,3099.21
  Bottom Layer w10: K5.1 1373,2323 1173,2323 1173,2601 1352,2780 1365,2793 1638,3066 v1(2920,3066)
NetIC3_17: IC3.17 K5.2 | length 2024
  Top Layer w10: K5.2 v1(1765,2615) ; v1(3057,3060) 3076.53,3079.53 IC3.17@3133.15,3079.53
  Bottom Layer w10: v1(1765,2615) 2014,2615 2290,2891 2290,3000 2331.9,3041.9 2467.1,3041.9 2497,3012 3009,3012 v1(3057,3060)
NetIC3_23: IC3.23 K9.5 | length 854.3
  Top Layer w10: IC3.23@3133.15,2961.42 3092,2961.42 3092,2401 3173,2320 3273,2320 K9.5
NetIC3_24: IC3.24 K9.4 | length 638.1
  Top Layer w10: IC3.24@3133.15,2941.73 3122.6,2941.73 3121.7,2940.83 3121.7,2543.3 3200,2465 K9.4
NetIC3_25: IC3.25 K9.3 | length 955.9
  Top Layer w10: K9.3 3195,2252 3280,2252 3327,2299 3327,2399.54 3155.7,2570.84 3155.7,2842.7 3191.73,2878.73 IC3.25@3191.73,2883.15
NetIC3_26: IC3.26 K9.2 | length 906.8
  Top Layer w10: IC3.26@3211.42,2883.15 3211.42,2925 3174,2925 3138.7,2889.7 3138.7,2561.03 3237,2462.72 v1(3237,2420)
  Bottom Layer w10: K9.2 3073,2420 v1(3237,2420)
NetIC3_27: IC3.27 K9.1 | length 1041.6
  Top Layer w10: IC3.27@3231.1,2883.15 3231.1,2842 3206,2842 3172.7,2808.7 3172.7,2751.3 v1(3318,2606)
  Bottom Layer w10: K9.1 2927,2320 3233,2320 3318,2405 v1(3318,2606)
NetIC3_30: IC3.30 R7.1 | length 4253.5
  Top Layer w10: v1(3288.22,2824.39) 3289.25,2825.42 3289.25,2882.24 IC3.30@3290.16,2883.15 ; v1(5578,2410) 5583.46,2415.46 5618,2415.46 5709.37,2506.83 5710.83,2506.83 5800,2596 5800,3164 5819.35,3183.35 5819.35,3728.65 5724.65,3823.35 R7.1
  Bottom Layer w10: v1(3288.22,2824.39) 3294.83,2831 3751,2831 4162,2420 5318,2420 5370,2368 5556.36,2368 5563.28,2374.92 5563.28,2384.45 5578,2399.18 v1(5578,2410)
NetIC3_31: IC3.31 K4.3 | length 3246.7
  Top Layer w10: v1(3236.65,3024.65) 3241.92,3024.65 3267.57,2999 3284.33,2999 3309.84,2973.48 IC3.31@3309.84,2883.15
  Bottom Layer w10: K4.3 1429.5,2479.5 2017.5,2479.5 2103,2565 3200,2565 3240,2605 3240,2662 3113,2789 3113,3136 3077,3172 3077,3221 3090,3234 3160,3234 3170,3079 3193.35,3055.65 3205.65,3055.65 v1(3236.65,3024.65)
NetIC3_32: IC3.32 K4.2 | length 2637.6
  Top Layer w10: v1(3203,2624) 3284.85,2542.15 3320,2542.15 3360,2582.15 3360,2621.67 3329.53,2652.15 IC3.32@3329.53,2883.15
  Bottom Layer w10: K4.2 1349.65,2499.65 1986.65,2499.65 2111,2624 v1(3203,2624)
NetIC3_33: IC3.33 K4.1 | length 2811.2
  Top Layer w10: IC3.33@3349.21,2883.15 3349.21,2781.54 3347,2779.33 3347,2687 v1(3384,2650)
  Bottom Layer w10: K4.1 1144,2306 1404,2306 1481,2383 1613,2383 1673,2323 1719,2323 1828,2432 3017,2432 3052,2467 3240,2467 3281,2508 3281,2623 3308,2650 v1(3384,2650)
NetIC3_34: IC3.34 K6.2 | length 2034.8
  Top Layer w10: IC3.34@3368.9,2883.15 3368.9,2809 3376.35,2801.55 3376.35,2771.65 v1(3384,2764)
  Bottom Layer w10: K6.2 1812.5,2462.5 2067.31,2462.5 2100.81,2496 3208,2496 3264,2552 3264,2639 3384,2759 v1(3384,2764)
NetIC3_35: IC3.35 K6.3 | length 2402.1
  Top Layer w10: v1(3339,2217) 3344,2222 3344,2472 3481,2609 3481,2757.58 3388.58,2850 IC3.35@3388.58,2883.15
  Bottom Layer w10: K6.3 1827,2323 2127,2323 2181,2377 2227,2377 2387,2217 v1(3339,2217)
NetIC3_38: IC3.38 K11.1 | length 776.2
  Top Layer w10: IC3.38@3466.85,2961.42 3427.42,2961.42 3416,2950 3416,2935 3589,2762 3589,2458 K11.1
NetIC3_39: IC3.39 K11.4 | length 1064.7
  Top Layer w10: IC3.39@3466.85,2981.1 3543.9,2981.1 v1(3583,2942) ; K11.4 v1(4000,2806)
  Bottom Layer w10: v1(3583,2942) 3864,2942 v1(4000,2806)
NetIC3_41: IC3.41 K11.5 | length 1207.5
  Top Layer w10: IC3.41@3466.85,3020.47 v1(3525.53,3020.47) ; v1(3789,2981) 3798,2972 3798,2506 3984,2320 4073,2320 K11.5
  Bottom Layer w10: v1(3525.53,3020.47) 3565,2981 v1(3789,2981)
NetIC3_44: IC3.44 K10.1 | length 1356
  Top Layer w10: IC3.44@3466.85,3079.53 3599.47,3079.53 3764,2915 3764,2620.27 3754.15,2610.42 v1(3754.15,2304.86)
  Bottom Layer w10: K10.1 3448,2299 3748.29,2299 v1(3754.15,2304.86)
NetIC3_45: IC3.45 K10.2 | length 1462.1
  Top Layer w10: IC3.45@3466.85,3099.21 3614.79,3099.21 3781,2933 3781,2433.41 3837,2377.41 3837,2280 3791,2234 3613,2234 K10.2
NetIC3_46: IC3.46 K12.7 R22.2 | length 5762
  Top Layer w10: v1(3379.3,3092.69) 3383.47,3092.69 3409.67,3118.9 IC3.46@3466.85,3118.9 ; R22.2 5745.35,3725.65 5722,3749 5599,3749 5548,3800 5548,3973 5842,3973 5870,3945 5870,3451.89 6245,3076.89 6245,2808.26 6265,2788.26 6265,2470 K12.7 6165,2486 6165,2553 6055,2663 v1(5976,2663)
  Bottom Layer w10: v1(3379.3,3092.69) 3602.91,3092.69 3611.22,3101 3824,3101 4262,2663 v1(5976,2663)
NetIC3_47: IC3.47 K12.9 R21.2 | length 5542.3
  Top Layer w10: IC3.47@3466.85,3138.58 3576.58,3138.58 v1(3596.58,3158.58) ; R21.2 5204,3660 v1(5339,3525)
  Bottom Layer w10: v1(3596.58,3158.58) 3616.58,3158.58 3696,3238 4059,3238 4400,2897 6075,2897 6365,2607 ; v1(5339,3525) 5339,3400 5283,3344 5168,3240 5168,3193 5219.91,3141.09 5949.91,3141.09 6365,2726 6365,2607 ; K12.9 6365,2470 6365,2607
NetIC3_48: IC3.48 K12.8 | length 3050.5
  Top Layer w10: IC3.48@3466.85,3158.27 3525.88,3158.27 3568.62,3201 v1(3738,3201)
  Bottom Layer w10: v1(3738,3201) 4011,3201 4464,2748 6008,2748 K12.8
NetIC4_2: 
NetIC4_3: 
NetIC4_4: 
NetIC4_5: 
NetIC4_6: 
NetIC4_7: 
NetIC4_8: 
NetIC4_9: 
NetIC4_12: 
NetIC4_13: 
NetIC4_14: 
NetIC4_15: 
NetIC4_19: 
NetIC4_20: 
NetK2_2: K2.2 RE1.4 RE1.7 | length 1425.7
  Top Layer w10: RE1.4@1545,4221.85 1755,4431.85 1755,4735 1810,4790 1800.85,4799.15 K2.2
  Bottom Layer w10: RE1.7 1196,3878.72 1196,4080 1337.85,4221.85 RE1.4@1545,4221.85
NetK3_1: K3.1 R2.1 R4.2 R9.2 R13.1 | length 3574.4
  Top Layer w10: R13.1 5524.65,4523 5782,4523 5782,4392 5840,4334 6080,4334 6139,4393 6139,4560 5979.65,4719.35 R2.1 ; R9.2 R2.1 ; K3.1 6350,3159 6350,3893.35 6295.35,3948 R4.2 6295.35,4561.35 6330,4596 6330,4800 6283,4847 6026.65,4847 5979.65,4800 R2.1
NetK8_1: K8.1 L2.2 | length 974.6
  Top Layer w10: v1(4750,2554) L2.2
  Bottom Layer w10: v1(4750,2554) 5331,2554 K8.1
NetK8_2: K8.2 L2.3 | length 2005.8
  Top Layer w10: L2.3 v1(4750,3273) ; K8.2@5677,2408 5844,2575 v1(5844,3040)
  Bottom Layer w10: v1(4750,3273) 4898.91,3124.09 5759.91,3124.09 v1(5844,3040)
NetL2_4: L2.4 T3.3 | length 1247.6
  Top Layer w10: T3.3 3996,4075 4650,3421 L2.4
NetR7_2: R7.2 R10.1 T1.1 | length 1961.5
  Top Layer w10: R10.1 4864.65,3599.35 v1(4865,3599) v1@4879,3599 ; T1.1 v1(5592.95,3610.69) ; v1(5805,3869) 5805.35,3869.35 R7.2
  Bottom Layer w10: v1(4865,3599) v1@4879,3599 ; v1(5592.95,3610.69) 5581.26,3599 v1@4879,3599 ; v1(5805,3869) 5662,3869 5490,3697 4977,3697 v1@4879,3599
NetR11_1: R11.1 R12.1 | length 358.6
  Top Layer w10: R11.1 v1(5079.65,4863) ; v1(5229,4765) R12.1
  Bottom Layer w10: v1(5079.65,4863) 5131,4863 v1(5229,4765)
NetR17_1: R17.1 T2.1 T4.3 T5.1 | length 3545
  Top Layer w10: R17.1 3630,3611 ; T2.1 3690,4297.66 3690,3646 3658.78,3614.78 ; v1(4030,3585) 3953.76,3585 3923.98,3614.78 3658.78,3614.78 ; v1(5601,3087.09) T4.3 ; T5.1 v1(5988.6,3046.6) ; 3630,3611 3654.58,3614.22 3658.78,3614.78 ; 3630,3611 3655,3611 3658.78,3614.78
  Bottom Layer w10: v1(4030,3585) 4527.91,3087.09 v1(5601,3087.09) 5685.09,3003 5945,3003 v1(5988.6,3046.6)
NetR18_1: R18.1 T3.1 | length 1634.6
  Top Layer w10: T3.1 4080,3875 4130,3825 v1(4130,3538) ; v1(5124.65,3354) R18.1
  Bottom Layer w10: v1(4130,3538) 4314,3354 v1(5124.65,3354)
NetR18_2: R18.2 T2.2 T5.2 | length 3268.4
  Top Layer w10: T2.2 3574.51,4380 3597.51,4403 3753,4403 v1(4711,3445) ; v1(5205,3354) 5205,3415 R18.2 v1(5205.35,3214.65) ; T5.2 5960,3121.4 5989,3150.4 v1(5989,3169)
  Bottom Layer w10: v1(4711,3445) 4773,3383 5023,3383 5031,3391 5168,3391 v1(5205,3354) ; v1(5205.35,3214.65) 5251,3169 v1(5989,3169)
NetR19_2: R19.2 R20.2 T4.1 | length 1062
  Top Layer w10: R19.2 5585.35,3822.65 5640,3768 5735,3768 5802.35,3700.65 5802.35,3562.49 5765.35,3525.49 R20.2 5765.35,3256.65 5775,3247 5775,3090.34 T4.1
VIN: B1.1 C1.1 R3.2 R17.2 T2.3 T3.2 | length 3813.9
  Top Layer w10: R3.2 R3.2@2689.61,4744.49 ; R3.2@2675.55,4744.16 R3.2@2675.55,4744.49 ; T2.3@3603.13,4240 T2.3 ; R17.2@3604.49,3685.31 R17.2 R17.2@3624.09,3665.71
  Top Layer w120: 3489,4136.69 T2.3@3603.13,4240
  Top Layer w130: R3.2@2689.61,4744.49 2722,4551.03 ; 3489,3800.8 R17.2@3604.49,3685.31
  Top Layer w150: B1.1 1893.58,4118.42 2045,3967 2560.15,3967 2722,4128.85 2722,4551.03 ; 3489,3800.8 v1(3489,3975) 3489,4136.69
  Bottom Layer w90: 3825,3975 T3.2
  Bottom Layer w150: C1.1 2793.15,4200 3150,4200 3375,3975 v1(3489,3975) 3825,3975
pads on no net: IC3.4 IC3.5 IC3.6 IC3.7 IC3.8 IC3.9 IC3.12 IC3.13 IC3.18 IC3.19 IC3.36 IC3.37 K12.3 K12.5 RE1.2 T1.3